# Altium PCB PCB_small_version.PcbDoc
Units mm, origin at the board's own origin, x right, y up, seen from the top; angles counter-clockwise.
Board outline 39.93 x 58.32 mm, 2 copper layers (Top Layer, Bottom Layer); 28 components, 24 nets, 130 pads, 41 vias.
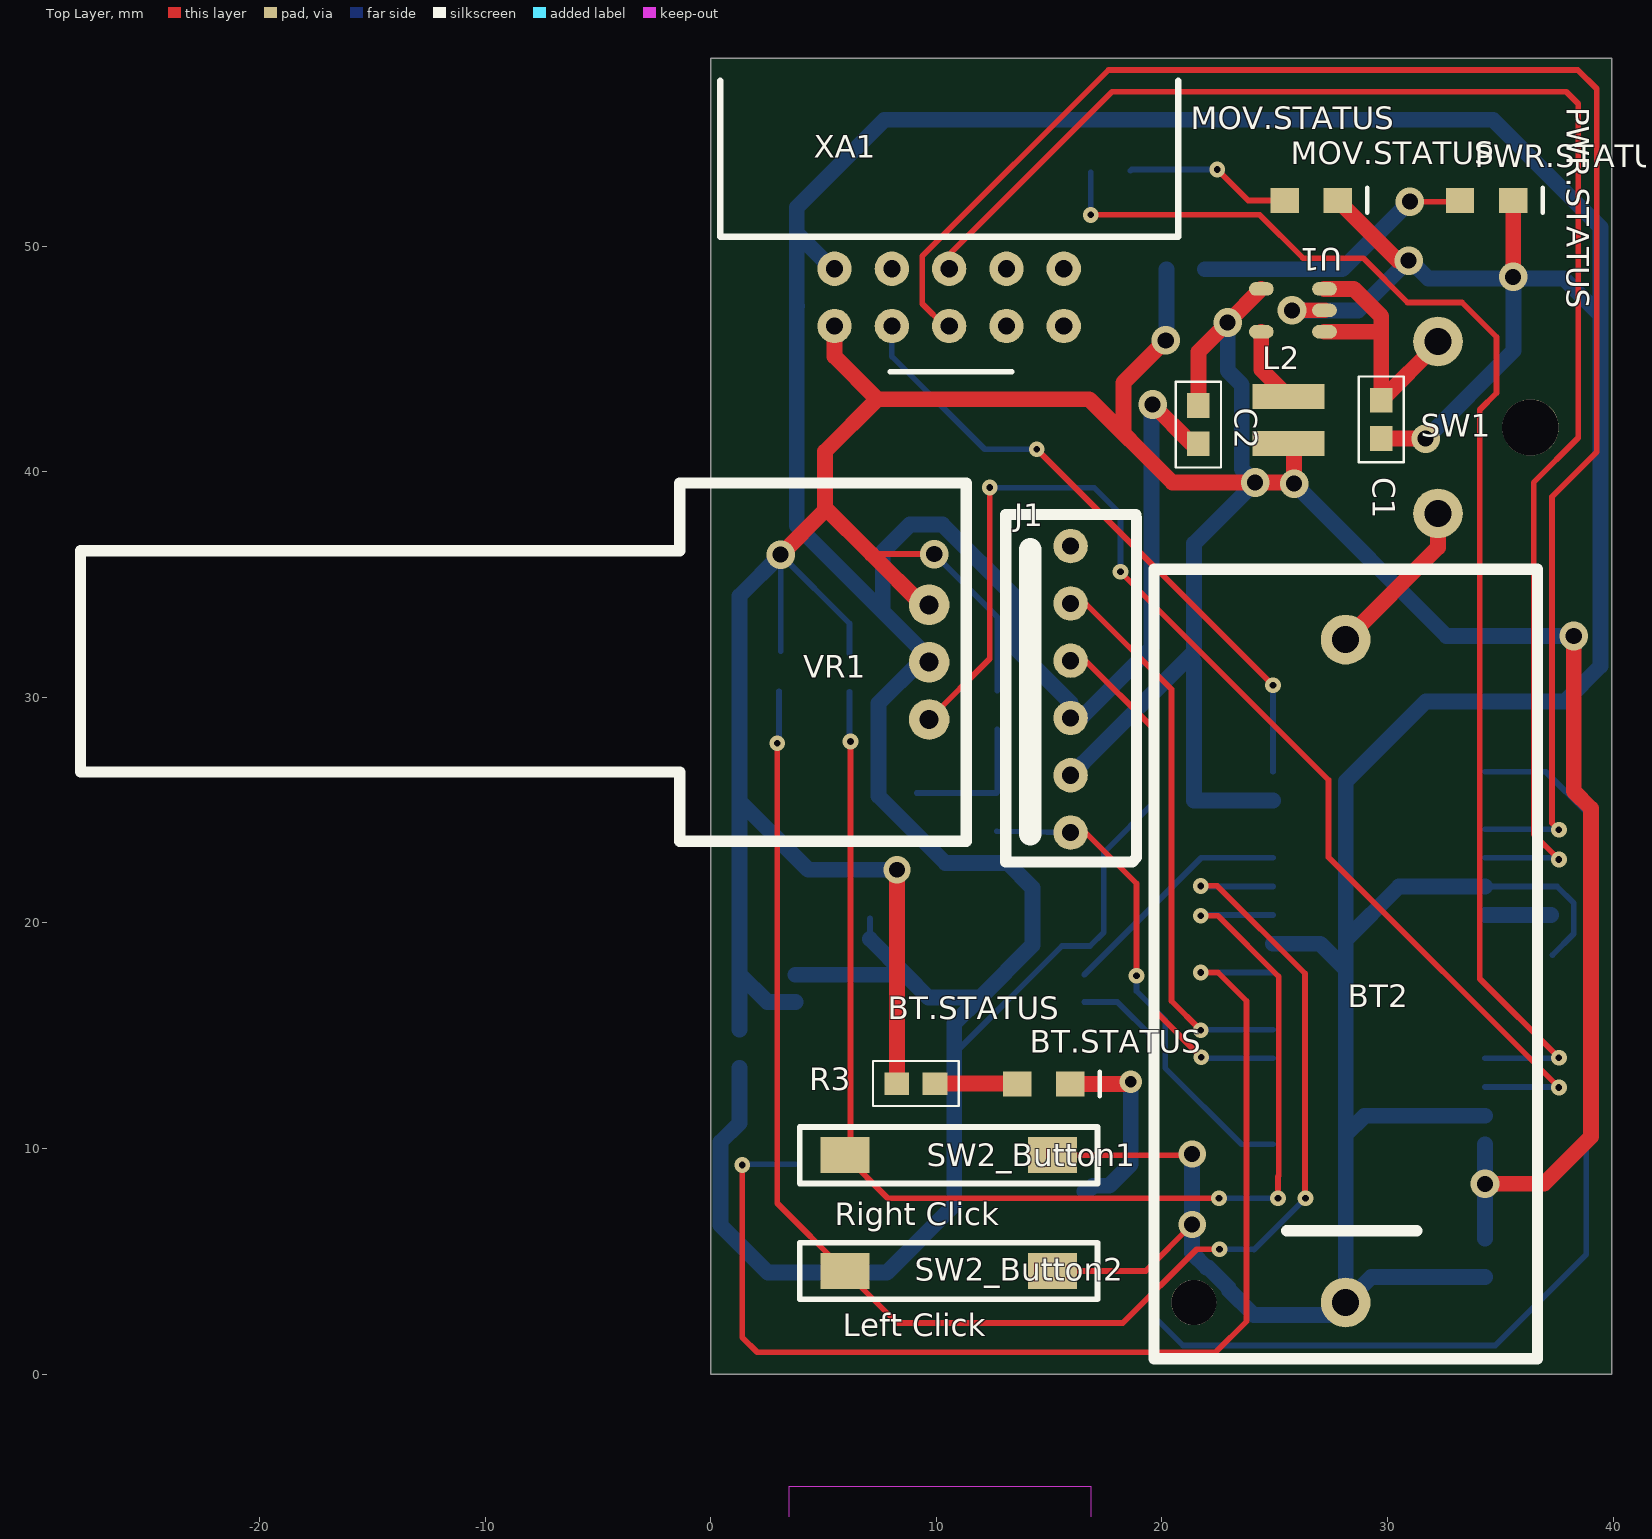
[diagram p0: Top Layer view]
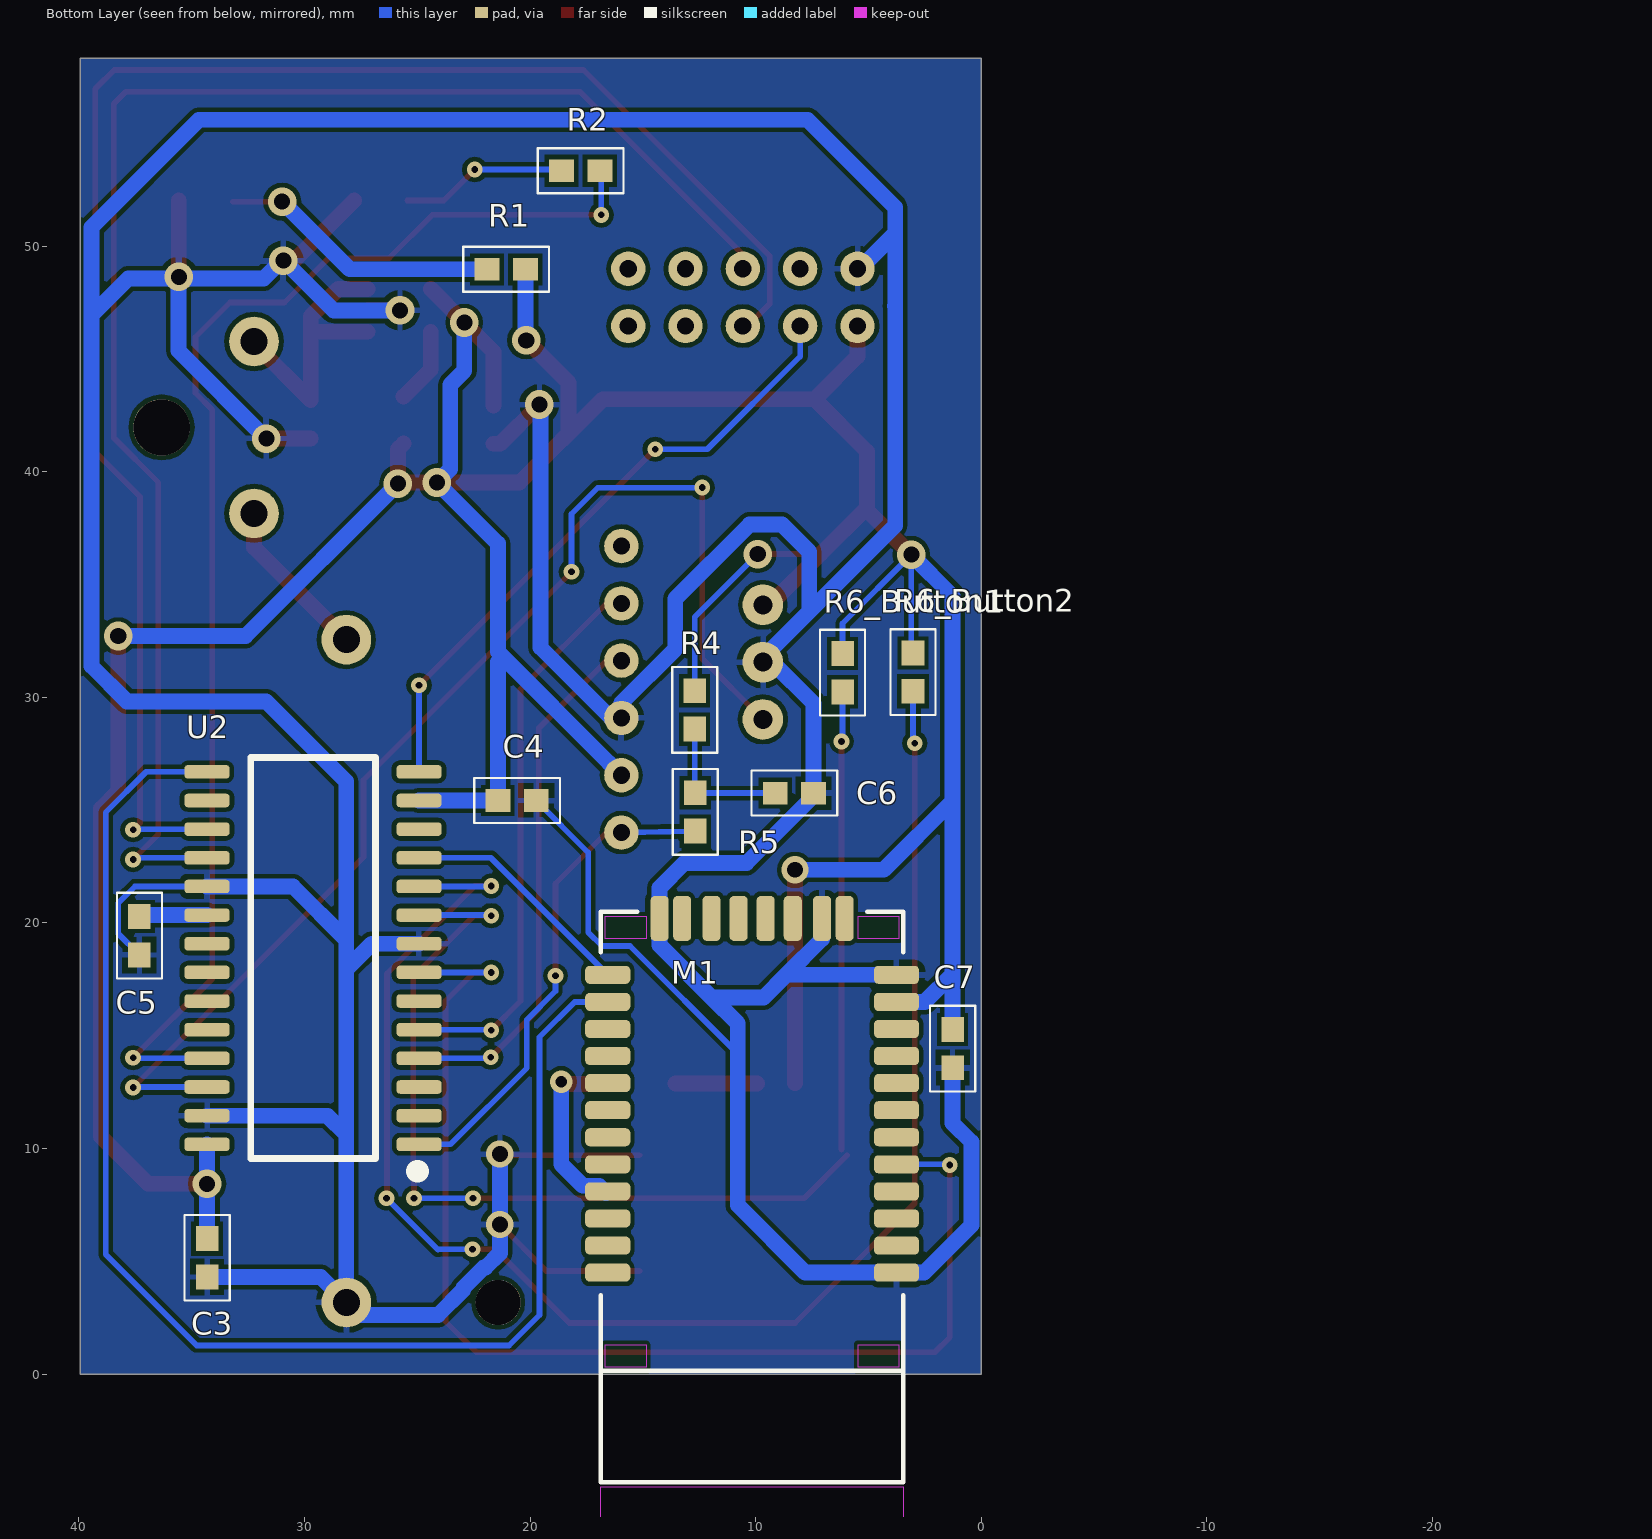
[diagram p1: Bottom Layer view, seen from below]

## Layer stack, top to bottom
Top Solder: solder mask 0.0102, Solder Resist, Dk 3.5
Top Layer: signal copper 0.0356
Dielectric 1: dielectric 0.32, FR-4, Dk 4.8
Bottom Layer: signal copper 0.0356
Bottom Solder: solder mask 0.0102, Solder Resist, Dk 3.5

## Board outline
0,0 39.929,0 39.929,58.318 0,58.318

## Design rules (kind name [scope] priority, off if disabled: settings)
Clearance [All] p1: gap=0.2
HoleSize [All] p1: absolutevalues=TRUE maxlimit=2.54 minlimit=0.3 maxpercent=80.000 minpercent=20.000
PolygonConnect [All] p1: connectstyle=Relief reliefconductorwidth=0.254 reliefentries=4 polygonreliefangle="90 Angle" airgapwidth=0.254
RoutingVias [All] p1: holewidth=0.711 width=1.27 viastyle="Through Hole" minholewidth=0.3 minwidth=0.7 maxholewidth=0.711 maxwidth=1.27
SilkToBoardRegionClearance [All] p1 off:
SolderMaskExpansion [All] p1: expansion=0.102
UnpouredPolygon [All] p1: allowunpoured=FALSE
Width [All] p1: maxlimit=1 minlimit=0.2 preferedwidth=0.254
27 further rules are at their usual default settings.

## Classes and differential pairs
channel class Button: Button1 Button2
component class PIC32MX: C3 C4 C5 C6 J1 MOV.STATUS R2 R4 R5 U2 VR1
component class Button2: R6_Button2 SW2_Button2
component class Button1: R6_Button1 SW2_Button1
component class Bluetooth: BT.STATUS C7 M1 R3
component class Alim: C1 C2 L2 PWR.STATUS R1 SW1 U1
component class 9-axe: XA1

## Components (designator, comment, footprint, x,y, rotation, side; value= is the part's Value field where it differs from the comment)
BT2 "Battery" "Battery Holder" 28.143,3.175 r90 top
BT.STATUS "2mA, 1.8V" LED 14.757,12.852 r0 top (schematic designator D3)
C1 "4.7 uF" "CAP 0603" 29.718,42.316 r90 top
C2 "10 uF" "CAP 0603" 21.615,42.088 r90 top
C3 "0.1uF" "CAP 0603" 34.315,5.156 r90 bottom
C4 "0.1uF" "CAP 0603" 20.574,25.425 r0 bottom
C5 "10uF" "CAP 0603" 37.313,19.431 r90 bottom
C6 "0.1uF" "CAP 0603" 8.28,25.756 r0 bottom
C7 "Cap" "CAP 0603" 1.27,14.427 r90 bottom
J1 "Program / Debug" ICSP 15.951,24.003 r90 top
L2 "4.7uH" Coil 25.603,42.291 r270 top
M1 "RN42" RN42 3.454,20.498 r0 bottom
MOV.STATUS "2mA, 1.8V" LED 26.619,52.019 r0 top (schematic designator D2)
PWR.STATUS "2mA, 1.8V" LED 34.392,52.019 r0 top (schematic designator D1)
R1 "750" "RES 0603" 21.057,48.971 r180 bottom
R2 "750" "RES 0603" 17.755,53.34 r180 bottom
R3 "750" "RES 0603" 9.093,12.878 r180 top
R4 "10K" "RES 0603" 12.7,29.439 r90 bottom
R5 "1K" "RES 0603" 12.675,24.917 r90 bottom
R6_Button1 "10k" "RES 0603" 6.147,31.09 r90 bottom (schematic designator R6)
R6_Button2 "10k" "RES 0603" 3.023,31.115 r90 bottom (schematic designator R6)
SW1 "SW" "SWITCH ON/OFF" 32.233,38.151 r90 top
SW2_Button1 "SW-SPST" SWITCH 5.944,9.703 r0 top (schematic designator SW2)
SW2_Button2 "SW-SPST" SWITCH 5.944,4.572 r0 top (schematic designator SW2)
U1 "MCP1503B" MCP1603B/TSOT 27.203,46.203 r180 top
U2 "PIC32MX150F128B" PIC32MX150F128B 24.917,10.185 r0 bottom
VR1 "5k" 91A1A-B28-B13L 11.328,39.497 r180 top
XA1 "MOD-MPU9150 Breakout Board" MOD-MPU9150 10.947,51.841 r90 top

## Footprints (in the part's own frame and the unit in brackets; to place one, negate y for a bottom-side part, rotate by r counter-clockwise, add the part's x,y. Pads: shape width x height; smd on the part's side, far side on the other; paste and mask are expansions set on the pad)
91A1A-B28-B13L [mm] "Potard"
  round 1.8 hole 0.85: 1(1.65,5.4) 2(1.65,7.94) 3(1.65,10.48)
  silkscreen extent 0,0 39.27,15.88
"Battery Holder" [mm]
  round 2 hole 2 unplated: 0(0,6.73)
  round 2.2 hole 1.2: 1(29.38,0) 2(0,0)
  silkscreen extent -2.5,-8.5 32.5,8.5
"CAP 0603" [mm]
  rect 1.1x1 smd: 1(-0.85,0) 2(0.85,0)
  silkscreen extent -1.9,-1 1.9,1
Coil [mm]
  rect 1.12x3.2 smd: 1(-1.04,0) 2(1.04,0)
ICSP [mil] "ICSP - 6 PINS"
  round 60 hole 30: 1(0.01,-0.02) 2(100.01,-0.02) 3(200.01,-0.02) 4(300.01,-0.02) 5(400.01,-0.02) 6(500.01,-0.02)
  silkscreen extent -51,-115 555,113
LED [mm]
  rect 1.25x1.1 smd: 1(-1.175,0) 2(1.175,0)
  silkscreen extent 2.49,-0.53 2.49,0.56
MCP1603B/TSOT [mm] "TSOT Package for MCP1603 and MCP1603B buck regulator"
  oval 1.1x0.6 smd: 1(0,0) 2(0,-0.95) 3(0,-1.9) 4(2.8,-1.9) 5(2.8,0)
MOD-MPU9150 [mil] "Header for the UEXT + 1"
  round 60 hole 30: 1(-212,215) 2(-112,215) 4(-112,115) 5(-212,15) 6(-112,15) 7(-212,-85) 8(-112,-85) 9(-212,-185) 10(-112,-185) 14(-212,115)
  silkscreen extent -292,-385 216,415
PIC32MX150F128B [mm] "SOIC Package"
  rrect50% 2x0.6 smd: 1(0,0) 2(0,-1.27) 3(0,-2.54) 4(0,-3.81) 5(0,-5.08) 6(0,-6.35) 7(0,-7.62) 8(0,-8.89) 9(0,-10.16) 10(0,-11.43) 11(0,-12.7) 12(0,-13.97) 13(0,-15.24) 14(0,-16.51) 15(9.4,-16.51) 16(9.4,-15.24) 17(9.4,-13.97) 18(9.4,-12.7) 19(9.4,-11.43) 20(9.4,-10.16) 21(9.4,-8.89) 22(9.4,-7.62) 23(9.4,-6.35) 24(9.4,-5.08) 25(9.4,-3.81) 26(9.4,-2.54) 27(9.4,-1.27) 28(9.4,0)
  silkscreen extent 0.05,-17.14 7.46,1.19
"RES 0603" [mm]
  rect 1.1x1 smd: 1(-0.85,0) 2(0.85,0)
  silkscreen extent -1.9,-1 1.9,1
RN42 [mm] "RN42 Bluetooth Module with antenna"
  rrect50% 2x0.8 smd: 1(0.3,16) 2(0.3,14.8) 3(0.3,13.6) 4(0.3,12.4) 5(0.3,11.2) 6(0.3,10) 7(0.3,8.8) 8(0.3,7.6) 9(0.3,6.4) 10(0.3,5.2) 11(0.3,4) 12(0.3,2.8) 13(13.1,2.8) 14(13.1,4) 15(13.1,5.2) 16(13.1,6.4) 17(13.1,7.6) 18(13.1,8.8) 19(13.1,10) 20(13.1,11.2) 21(13.1,12.4) 22(13.1,13.6) 23(13.1,14.8) 24(13.1,16)
  rrect50% 0.8x2 smd mask+0.05: 28(10.8,0.3) 29(3.6,0.3) 30(9.8,0.3) 35(2.6,0.3)
  rrect50% 0.8x2 smd: 31(8.5,0.3) 32(7.3,0.3) 33(6.1,0.3) 34(4.9,0.3)
  Top Layer keep-out region: 11.4,1.2 13.2,1.2 13.2,0.2 11.4,0.2
  Top Layer keep-out region: 0.2,20.2 2,20.2 2,19.2 0.2,19.2
  Top Layer keep-out region: 11.4,20.2 13.2,20.2 13.2,19.2 11.4,19.2
  Top Layer keep-out region: 0.2,1.2 2,1.2 2,0.2 0.2,0.2
  Multi-Layer keep-out region: 0,54.3 13.4,54.3 13.4,25.5 0,25.5
  silkscreen extent 0,0 13.4,25.3
SWITCH [mm]
  rect 2.18x1.6 smd: 1(0,0) 2(9.2,0)
  silkscreen extent -2,-1.25 11.2,1.25
"SWITCH ON/OFF" [mm]
  round 2.5 hole 2.5 unplated: 0(3.81,-4.1)
  round 2.2 hole 1.2: 1(0,0) 2(7.62,0)

## Part data
BT2: "Multicell Battery"
BT.STATUS MOV.STATUS PWR.STATUS: library part LED0, "Typical INFRARED GaAs LED"
C1 C2 C3 C4 C5 C6: library part Cap, "Capacitor"
C7: "Capacitor"
J1: library part MHDR1X6, "Header, 6-Pin"
L2: library part Inductor, "Inductor"
M1: "RN42 Bluetooth Module by Roven Networks"
R1 R2 R3 R4 R5 R6_Button1 R6_Button2: library part Res1, "Resistor"
SW1: library part SW-SPST, "Single-Pole, Single-Throw Switch"
SW2_Button1 SW2_Button2: "Single-Pole, Single-Throw Switch"
U1: library part MCP1603B, "Fixed 3.3Vout 0.5Aout regulator"
U2: library part PIC32MX130F256B, "PIC32MX Family Microcontroller"
VR1: library part RPot, "Potentiometer"
XA1: library part MPU9150, "MPU9150 Breakout Board, displaying 3 headers"

## Via types
v1: diameter 0.7, hole 0.3, Top Layer to Bottom Layer, 21 vias
v2: diameter 1.27, hole 0.711, Top Layer to Bottom Layer, 14 vias
v3: diameter 1.21, hole 0.7, Top Layer to Bottom Layer, 3 vias
v4: diameter 0.7, hole 0.3, Top Layer to Bottom Layer, tented bottom, 2 vias
v5: diameter 1, hole 0.5, Top Layer to Bottom Layer, 1 vias

## Nets (pads, with @x,y where several pads share a name; then routed paths per layer and width w, separated by ;. In a path a pad name is that pad's centre, name@x,y a point inside that pad or via, vN(x,y) a via of type N, cw(c..) or ccw(c..) an arc to the next point about the centre after c; other vN are vias at no path point)
"BOUTTON 1": R6_Button1.1 SW2_Button1.1 U2.9 | length 57.9
  Top Layer w0.254: SW2_Button1.1 7.849,7.798 v4(22.53,7.798) ; v1@6.096,28.042 v1(6.198,28.042) SW2_Button1.1@6.198,9.957 ; v1(21.717,20.32) 22.479,20.32 25.171,17.628 25.171,8.788 ; v4(25.146,7.798) 25.146,8.763
  Bottom Layer w0.254: v1@6.147,28.092 R6_Button1.1 ; v1@21.742,20.345 U2.9 ; v4(22.53,7.798) v4(25.146,7.798)
"BOUTTON 2": R6_Button2.1 SW2_Button2.1 U2.10 | length 69.9
  Top Layer w0.254: v1(2.946,27.965) 2.946,7.569 SW2_Button2.1 8.255,2.261 18.263,2.261 21.539,5.537 v1(22.555,5.537) ; v1@21.742,21.641 22.454,21.641 26.34,17.755 v1@26.34,7.823
  Bottom Layer w0.254: v1@3.023,28.042 R6_Button2.1 ; v1@21.742,21.615 U2.10 ; v1(22.555,5.537) 24.054,5.537 24.079,5.512 v1(26.365,7.798)
  other v1: 21.717,21.641
GND: BT2.2 C1.1 C2.1 C3.1 C4.1 C5.1 C6.1 C7.1 J1.3 M1.1 M1.12 M1.28 M1.29 MOV.STATUS.2 PWR.STATUS.2 SW2_Button1.2 SW2_Button2.2 U1.2 U2.8 U2.19 U2.27 VR1.2 XA1.2 | length 325.7
  Top Layer w0.254: SW2_Button2.2 19.279,4.572 v3(21.336,6.629) ; SW2_Button1.2 v3@21.285,9.703
  Top Layer w0.7: v2(19.583,42.977) 21.322,41.238 C2.1 ; v2(25.766,47.153) U1.2 ; MOV.STATUS.2 30.461,49.352 v2(30.937,49.352) ; C1.1 v2(31.687,41.466) ; v2(35.567,48.634) PWR.STATUS.2
  Bottom Layer w0.254: M1.29@7.054,19.285 M1.29 ; C6.1@7.43,25.628 C6.1 ; 10.795,14.199 15.567,18.971 16.812,18.971 17.424,19.583 17.424,23.126 C4.1 ; v2@25.756,47.142 v2(25.766,47.153) ; 28.13,19.241 28.143,19.253 ; U2.19 37.516,21.615 38.252,20.879 38.252,19.521 C5.1
  Bottom Layer w0.7: C7.1 1.27,11.125 0.432,10.287 0.432,6.604 2.538,4.498 M1.1 7.8,4.498 10.795,7.493 10.795,14.199 10.795,15.545 11.938,16.688 ; M1.12 8.642,17.698 ; 3.835,47.346 3.81,47.346 ; XA1.2 5.385,48.997 3.81,50.571 ; M1.29@7.054,19.285 8.642,17.698 ; C6.1@7.43,25.628 10.401,22.657 13.157,22.657 14.254,21.56 M1.28 14.254,19.004 11.938,16.688 ; C6.1 7.43,29.732 9.256,31.557 VR1.2 ; 7.62,33.884 7.62,36.449 8.825,37.654 10.275,37.654 13.564,34.366 13.564,32.132 15.952,29.744 J1.3 16.409,29.083 19.533,32.207 19.533,43.028 v2(19.583,42.977) ; VR1.2@9.774,31.653 3.81,37.617 3.81,47.346 ; v3(21.336,9.754) v3(21.336,6.629) 21.336,5.359 21.97,4.725 22.055,4.725 22.963,3.817 22.963,3.732 24.079,2.616 27.584,2.616 BT2.2 ; U2.8 27.013,19.075 28.143,17.945 ; v2@25.756,47.142 28.702,47.142 30.963,49.403 31.801,48.565 v2@35.567,48.565 ; v2(31.687,41.466) 35.585,45.364 v2@35.585,48.565 ; C3.1 29.274,4.306 BT2.2 ; U2.27 28.981,11.455 28.143,10.617 ; U2.19 30.505,21.615 28.143,19.253 ; v2(35.567,48.634) v2@35.611,48.59 ; v2@35.611,48.565 37.812,48.565 39.437,46.939 ; 3.81,47.346 3.81,50.571 ; 3.81,50.571 3.81,51.714 7.696,55.601 34.671,55.601 39.437,50.834 39.437,46.939 ; 8.642,17.698 9.652,16.688 11.938,16.688 ; BT2.2 28.143,10.617 ; 28.143,10.617 28.143,17.945 ; 28.143,17.945 28.143,19.253 ; 28.143,19.253 28.143,26.264 31.699,29.82 37.871,29.82 39.437,31.386 39.437,46.939
MCLR: J1.1 R5.1 U2.1 | length 22
  Top Layer w0.254: J1.1 16.612,24.003 18.872,21.743 v1(18.872,17.653)
  Bottom Layer w0.254: R5.1 J1.1 ; v1(18.872,17.653) 18.872,16.974 20.139,15.707 20.139,13.567 23.52,10.185 U2.1
NetBT2_1: BT2.1 SW1.1 | length 7.3
  Top Layer w0.7: BT2.1 32.233,36.644 SW1.1
NetC1_2: C1.2 SW1.2 U1.1 U1.3 | length 12.8
  Top Layer w0.7: U1.1 29.667,46.203 ; U1.3 28.504,48.103 29.718,46.888 C1.2 SW1.2@32.233,45.681
NetC5_2: C5.2 U2.20 | length 2.9
  Bottom Layer w0.7: U2.20 C5.2@37.248,20.345
NetC6_2: C6.2 R4.1 R5.2 | length 6.3
  Bottom Layer w0.254: C6.2 R5.2@12.663,25.756 ; R5.2@12.7,25.793 R4.1
NetD1_1: PWR.STATUS.1 R1.1 | length 12.5
  Top Layer w0.254: v2(30.988,51.968) PWR.STATUS.1@33.166,51.968
  Bottom Layer w0.7: R1.1 27.991,48.971 v2(30.988,51.968)
NetD2_1: MOV.STATUS.1 R2.1 | length 7.4
  Top Layer w0.254: v1(22.454,53.391) 23.825,52.019 MOV.STATUS.1
  Bottom Layer w0.254: R2.1 18.655,53.391 v1(22.454,53.391)
NetD3_1: BT.STATUS.1 R3.1 | length 3.6
  Top Layer w0.7: R3.1 BT.STATUS.1@13.557,12.878
NetD3_2: BT.STATUS.2 M1.21 | length 8.9
  Top Layer w0.7: BT.STATUS.2 v5@18.517,12.852
  Bottom Layer w0.7: M1.21 16.626,8.026 16.947,8.348 17.665,8.348 18.618,9.301 v5(18.618,12.954)
NetL2_1: L2.1 U1.5 | length 3.4
  Top Layer w0.7: U1.5 24.403,44.531 25.576,43.358 L2.1
NetM1_5: M1.5 U2.7 | length 53.1
  Top Layer w0.254: v1(1.397,9.271) 1.397,1.626 2.057,0.965 22.377,0.965 23.749,2.337 23.749,16.535 22.479,17.805 v1(21.717,17.805)
  Bottom Layer w0.254: v1@1.424,9.298 M1.5 ; v1(21.717,17.805) U2.7
NetM1_13: M1.13 U2.11 | length 10.5
  Bottom Layer w0.254: M1.13 21.742,22.885 U2.11
NetM1_14: M1.14 U2.15 | length 62.3
  Bottom Layer w0.254: M1.14 18.021,16.498 19.583,14.935 19.583,2.616 20.93,1.27 34.773,1.27 38.811,5.309 38.811,24.892 37.008,26.695 U2.15
NetR2_2: R2.2 U2.25 | length 59.1
  Top Layer w0.254: v1(16.84,51.384) 24.333,51.384 26.251,49.466 28.918,49.466 30.886,47.498 33.299,47.498 34.823,45.974 34.823,43.485 34.087,42.748 34.087,17.526 v1(37.592,14.021)
  Bottom Layer w0.254: v1(16.84,51.384) R2.2@16.84,53.276 ; U2.25 v1@37.567,13.995
NetU2_14: U2.14 XA1.14 | length 28.1
  Top Layer w0.254: v1(14.453,40.996) v1(24.917,30.531)
  Bottom Layer w0.254: XA1.14 8.026,45.11 12.141,40.996 v1(14.453,40.996) ; U2.14 v1(24.917,30.531)
NetU2_17: U2.17 XA1.5 | length 74.4
  Top Layer w0.254: XA1.5 10.363,46.457 9.373,47.447 9.373,49.555 17.628,57.81 38.43,57.81 39.268,56.972 39.268,40.869 37.29,38.891 37.29,24.432 v1(37.592,24.13)
  Bottom Layer w0.254: U2.17 v1@37.567,24.155
NetU2_18: U2.18 XA1.6 | length 69.7
  Top Layer w0.254: XA1.6 10.566,49.632 17.78,56.845 37.922,56.845 38.456,56.312 38.456,41.504 36.474,39.522 36.474,23.927 v1(37.592,22.809)
  Bottom Layer w0.254: U2.18 v1@37.516,22.885
NetU2_26: U2.26 VR1.3 | length 54.4
  Top Layer w0.254: VR1.3 12.37,31.708 v1(12.37,39.294) ; v1(18.161,35.56) 27.381,26.34 27.381,22.911 v1(37.592,12.7)
  Bottom Layer w0.254: v1(12.37,39.294) 16.993,39.294 18.161,38.125 v1(18.161,35.56) ; U2.26 v1@37.567,12.725
PGEC: J1.5 U2.5 | length 24.9
  Top Layer w0.254: J1.5 16.612,34.163 20.422,30.354 20.422,16.535 v1(21.717,15.24)
  Bottom Layer w0.254: v1@21.742,15.265 U2.5
PGED: J1.4 U2.4 | length 23.5
  Top Layer w0.254: J1.4 16.612,31.623 19.609,28.626 19.609,16.18 v1(21.742,14.046)
  Bottom Layer w0.254: v1@21.793,13.995 U2.4
V3P3: C2.2 C3.2 C4.2 C7.2 J1.2 L2.2 M1.11 R1.2 R3.2 R4.2 R6_Button1.2 R6_Button2.2 U1.4 U2.13 U2.28 VR1.1 XA1.1 | length 197.5
  Top Layer w0.254: 7.123,36.347 v2(9.906,36.347)
  Top Layer w0.7: v2(3.099,36.322) 5.062,38.286 ; XA1.1 5.486,45.11 7.383,43.214 ; R3.2@8.255,12.89 v3(8.255,22.352) ; VR1.1@9.374,34.097 7.123,36.347 5.062,38.408 5.062,40.894 7.383,43.214 ; 18.288,41.7 18.288,43.942 v2(20.168,45.822) ; C2.2 21.615,45.315 v2(22.911,46.61) U1.4 ; L2.2 25.857,40.997 v2(25.857,39.472) ; v2@25.806,39.522 v2(24.13,39.522) 20.466,39.522 16.774,43.214 7.383,43.214 ; v2(34.315,8.433) 36.932,8.433 39.014,10.516 39.014,25.07 38.252,25.832 v2(38.252,32.715)
  Bottom Layer w0.254: R6_Button2.2@3.099,32.041 v2(3.099,36.322) 6.147,33.274 R6_Button1.2 ; v2(9.906,36.347) 12.7,33.553 R4.2
  Bottom Layer w0.7: C7.2 1.27,17.729 ; v2(3.099,36.322) 1.27,34.493 1.27,25.4 ; M1.11 2.501,16.498 1.27,17.729 ; v3(8.255,22.352) 4.318,22.352 1.27,25.4 ; 16.497,27.089 21.424,32.016 21.424,36.816 v2(24.13,39.522) 23.537,40.115 23.537,43.849 22.911,44.475 v2(22.911,46.61) ; v2@20.207,45.861 R1.2 ; 21.424,31.558 C4.2 U2.13 ; v2(25.857,39.472) 32.614,32.715 v2(38.252,32.715) ; C3.2 v2(34.315,8.433) U2.28@34.315,10.183 ; 1.27,17.729 1.27,25.4
pads on no net: BT2.0 J1.6 M1.2 M1.3 M1.4 M1.6 M1.7 M1.8 M1.9 M1.10 M1.15 M1.16 M1.17 M1.18 M1.19 M1.20 M1.22 M1.23 M1.24 M1.30 M1.31 M1.32 M1.33 M1.34 M1.35 SW1.0 U2.2 U2.3 U2.6 U2.12 U2.16 U2.21 U2.22 U2.23 U2.24 XA1.4 XA1.7 XA1.8 XA1.9 XA1.10

## Polygon pours and split planes (outlines as drawn)
GND on Bottom Layer "GND PLAN" (solid, pour order 3): 0,58.318 39.929,58.318 39.929,0 0,0

## Silkscreen, mask and mechanical layers (free items; w line width, h text height)
Top Overlay:
  text "PWR.STATUS" at 37.948,56.159 h1 r270
  text "MOV.STATUS" at 21.285,55.169 h1
  text "BT.STATUS" at 7.849,15.723 h1
  text "Right Click" at 5.486,6.604 h1
  text "Left Click" at 5.842,1.676 h1
Board Outline:
  the board outline again, w0.254

## Dimensions
39.929,58.318 to 0,58.318 on Mechanical 16
0,58.318 to 0,0 on Mechanical 16